# EAGLE board POVRotor (EAGLE 8.4.1)
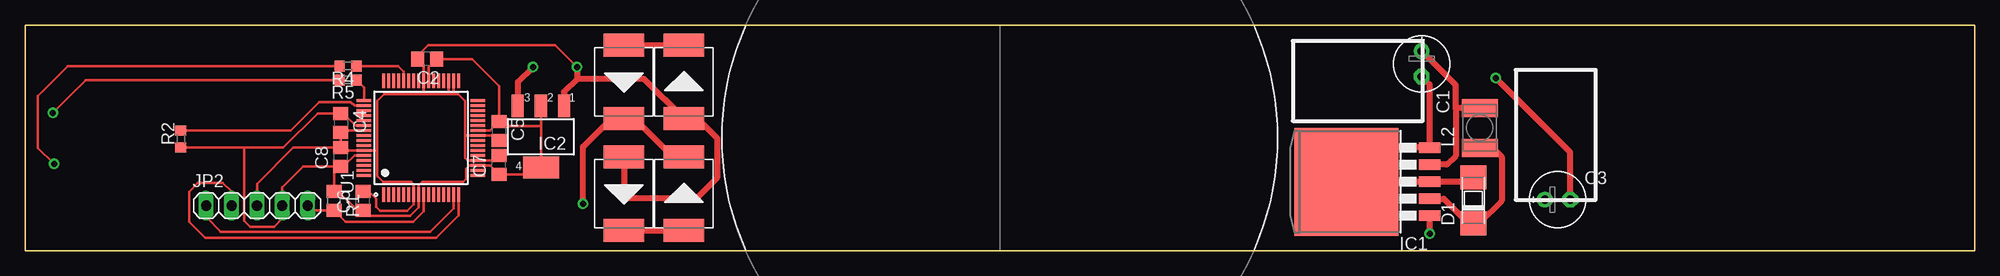
[diagram p0: board, top side]
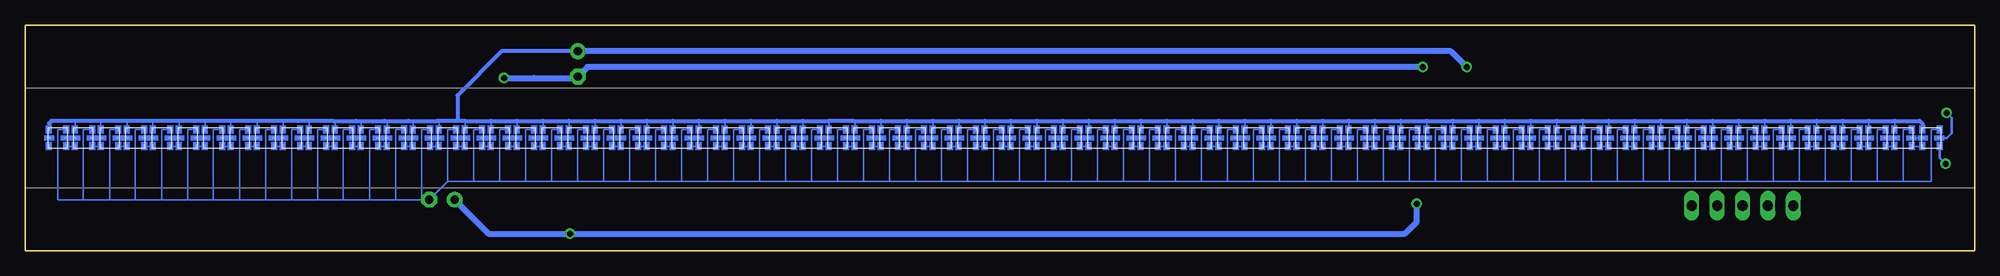
[diagram p1: board, bottom side, seen from below]

Size 195 x 22.6 mm. Coordinates in mm from the lower left corner, seen from the top.
Outline: 0,22.6 195,22.6 195,0 0,0 0,22.6
Copper layers (1*16): Top 0.035mm / dielectric 1.5mm / Bottom 0.035mm
Design rules "default *": minimum track width 0.1mm, minimum drill 24mil, track to track 8mil, track to pad 8mil, pad to pad 8mil, via to via 8mil, smd to smd 8mil, copper to edge 40mil, drill to drill 8mil, minimum pad ring 10mil, minimum via ring 8mil, stop-mask expansion 4mil, vias tented up to drill 0mil, thermal gap 10mil

## Footprints (pad centres in the part's own frame; a part is rotated, then mirrored left to right if it is on the bottom)
E2,5-6E = drill 0.813 pad 1.575: + -1.27,0 | drill 0.813 pad 1.575 octagon: - 1.27,0
C0805 = smd 1.3 x 1.5: 1 -0.95,0; 2 0.95,0
SOD106A = smd 2.4 x 2.6: A 2.3,0; K -2.3,0
DO-214AB = smd 2.286 x 4.064: 1 -3.683,0; 2 3.683,0
TO263-5 = smd 1.067 x 2.159: 1 -3.404,-5.791; 2 -1.702,-5.791; 3 0,-5.791; 4 1.702,-5.791; 5 3.404,-5.791 | smd 10.8 x 10.41: 6 0,2.54
SOT223 = smd 1.219 x 2.235: 1 -2.311,-3.099; 2 0,-3.099; 3 2.311,-3.099 | smd 3.6 x 2.2: 4 0,3.099
1X05 = drill 1.016 long: 1 -5.08,0; 2 -2.54,0; 3 0,0; 4 2.54,0; 5 5.08,0
L4532P = smd 1.8 x 3.6: 1 -2,0; 2 2,0
R0805 = smd 1.3 x 1.5: 1 -0.95,0; 2 0.95,0
R0603 = smd 1 x 1.1: 1 -0.85,0; 2 0.85,0
QFP50P1200X1200X120-64N = smd 1.45 x 0.3: 1 -5.7,3.75; 2 -5.7,3.25; 3 -5.7,2.75; 4 -5.7,2.25; 5 -5.7,1.75; 6 -5.7,1.25; 7 -5.7,0.75; 8 -5.7,0.25; 9 -5.7,-0.25; 10 -5.7,-0.75; 11 -5.7,-1.25; 12 -5.7,-1.75; 13 -5.7,-2.25; 14 -5.7,-2.75; 15 -5.7,-3.25; 16 -5.7,-3.75; 33 5.7,-3.75; 34 5.7,-3.25; 35 5.7,-2.75; 36 5.7,-2.25; 37 5.7,-1.75; 38 5.7,-1.25; 39 5.7,-0.75; 40 5.7,-0.25; 41 5.7,0.25; 42 5.7,0.75; 43 5.7,1.25; 44 5.7,1.75; 45 5.7,2.25; 46 5.7,2.75; 47 5.7,3.25; 48 5.7,3.75 | smd 0.3 x 1.45: 17 -3.75,-5.7; 18 -3.25,-5.7; 19 -2.75,-5.7; 20 -2.25,-5.7; 21 -1.75,-5.7; 22 -1.25,-5.7; 23 -0.75,-5.7; 24 -0.25,-5.7; 25 0.25,-5.7; 26 0.75,-5.7; 27 1.25,-5.7; 28 1.75,-5.7; 29 2.25,-5.7; 30 2.75,-5.7; 31 3.25,-5.7; 32 3.75,-5.7; 49 3.75,5.7; 50 3.25,5.7; 51 2.75,5.7; 52 2.25,5.7; 53 1.75,5.7; 54 1.25,5.7; 55 0.75,5.7; 56 0.25,5.7; 57 -0.25,5.7; 58 -0.75,5.7; 59 -1.25,5.7; 60 -1.75,5.7; 61 -2.25,5.7; 62 -2.75,5.7; 63 -3.25,5.7; 64 -3.75,5.7
2020LED = smd 0.305 x 0.152: CLKI -0.85,0; CLKO 0.85,0 | smd 0.152 x 0.305: GND -0.85,-0.85; SDI -0.85,0.85; SDO 0.85,0.85; VCC 0.85,-0.85

## Placement (x,y rotation side)
C1  [E2,5-6E]  139.7,18.7 270 top
C2  [C0805]  40.2,19.2 180 top
C3  [E2,5-6E]  153.3,5.1 0 top
C4  [C0805]  31.6,12.8 270 top
C5  [C0805]  47.4,12 270 top
C6  [C0805]  33.8,5 90 top
C7  [C0805]  47.4,8.6 90 top
C8  [C0805]  31.6,9.4 90 top
D1  [SOD106A]  144.89,5.04 90 top
D2  SMD-DIODE-SCHOTTKY-40V-3A(DO-214AB)  [DO-214AB]  65.9,5.7 90 top
D3  SMD-DIODE-SCHOTTKY-40V-3A(DO-214AB)  [DO-214AB]  59.9,16.9 270 top
D4  SMD-DIODE-SCHOTTKY-40V-3A(DO-214AB)  [DO-214AB]  65.9,16.9 90 top
D5  SMD-DIODE-SCHOTTKY-40V-3A(DO-214AB)  [DO-214AB]  59.9,5.7 270 top
IC1  LM2576S  [TO263-5]  134.7,6.9 90 top
IC2  [SOT223]  51.6,11.4 180 top
JP2  [1X05]  23.2,4.5 0 top
L2  [L4532P]  145.5,12.3 90 top
R1  [R0805]  30.9,5 270 top
R2  [R0603]  15.6,11.2 90 top
R4  [R0603]  32.3,18.5 180 top
R5  [R0603]  32.3,17.1 180 top
U1  PIC32MZ2048EFH064-I/PT  [QFP50P1200X1200X120-64N]  39.6,11.3 90 top
U$1  2020LED  [2020LED]  7.15,11.3 180 bottom
U$2  2020LED  [2020LED]  4.35,11.3 180 bottom
U$3  2020LED  [2020LED]  9.75,11.3 180 bottom
U$4  2020LED  [2020LED]  12.35,11.3 180 bottom
U$5  2020LED  [2020LED]  14.95,11.3 180 bottom
U$6  2020LED  [2020LED]  17.55,11.3 180 bottom
U$7  2020LED  [2020LED]  20.15,11.3 180 bottom
U$8  2020LED  [2020LED]  22.75,11.3 180 bottom
U$9  2020LED  [2020LED]  25.35,11.3 180 bottom
U$10  2020LED  [2020LED]  27.95,11.3 180 bottom
U$11  2020LED  [2020LED]  30.55,11.3 180 bottom
U$12  2020LED  [2020LED]  33.15,11.3 180 bottom
U$13  2020LED  [2020LED]  35.75,11.3 180 bottom
U$14  2020LED  [2020LED]  38.35,11.3 180 bottom
U$15  2020LED  [2020LED]  40.95,11.3 180 bottom
U$16  2020LED  [2020LED]  43.55,11.3 180 bottom
U$17  2020LED  [2020LED]  46.15,11.3 180 bottom
U$18  2020LED  [2020LED]  48.75,11.3 180 bottom
U$19  2020LED  [2020LED]  51.35,11.3 180 bottom
U$20  2020LED  [2020LED]  53.95,11.3 180 bottom
U$21  2020LED  [2020LED]  56.55,11.3 180 bottom
U$22  2020LED  [2020LED]  59.15,11.3 180 bottom
U$23  2020LED  [2020LED]  61.75,11.3 180 bottom
U$24  2020LED  [2020LED]  64.35,11.3 180 bottom
U$25  2020LED  [2020LED]  66.95,11.3 180 bottom
U$26  2020LED  [2020LED]  69.55,11.3 180 bottom
U$27  2020LED  [2020LED]  72.15,11.3 180 bottom
U$28  2020LED  [2020LED]  74.75,11.3 180 bottom
U$29  2020LED  [2020LED]  77.35,11.3 180 bottom
U$30  2020LED  [2020LED]  79.95,11.3 180 bottom
U$31  2020LED  [2020LED]  82.55,11.3 180 bottom
U$32  2020LED  [2020LED]  85.15,11.3 180 bottom
U$33  2020LED  [2020LED]  87.75,11.3 180 bottom
U$34  2020LED  [2020LED]  90.35,11.3 180 bottom
U$35  2020LED  [2020LED]  92.95,11.3 180 bottom
U$36  2020LED  [2020LED]  95.55,11.3 180 bottom
U$37  2020LED  [2020LED]  98.15,11.3 180 bottom
U$38  2020LED  [2020LED]  100.75,11.3 180 bottom
U$39  2020LED  [2020LED]  103.35,11.3 180 bottom
U$40  2020LED  [2020LED]  105.95,11.3 180 bottom
U$41  2020LED  [2020LED]  108.55,11.3 180 bottom
U$42  2020LED  [2020LED]  111.15,11.3 180 bottom
U$43  2020LED  [2020LED]  113.75,11.3 180 bottom
U$44  2020LED  [2020LED]  116.35,11.3 180 bottom
U$45  2020LED  [2020LED]  118.95,11.3 180 bottom
U$46  2020LED  [2020LED]  121.55,11.3 180 bottom
U$47  2020LED  [2020LED]  124.15,11.3 180 bottom
U$48  2020LED  [2020LED]  126.75,11.3 180 bottom
U$49  2020LED  [2020LED]  129.35,11.3 180 bottom
U$50  2020LED  [2020LED]  131.95,11.3 180 bottom
U$51  2020LED  [2020LED]  134.55,11.3 180 bottom
U$52  2020LED  [2020LED]  137.15,11.3 180 bottom
U$53  2020LED  [2020LED]  139.75,11.3 180 bottom
U$54  2020LED  [2020LED]  142.35,11.3 180 bottom
U$55  2020LED  [2020LED]  144.95,11.3 180 bottom
U$56  2020LED  [2020LED]  147.55,11.3 180 bottom
U$57  2020LED  [2020LED]  150.15,11.3 180 bottom
U$58  2020LED  [2020LED]  152.75,11.3 180 bottom
U$59  2020LED  [2020LED]  155.35,11.3 180 bottom
U$60  2020LED  [2020LED]  157.95,11.3 180 bottom
U$61  2020LED  [2020LED]  160.55,11.3 180 bottom
U$62  2020LED  [2020LED]  163.15,11.3 180 bottom
U$63  2020LED  [2020LED]  165.75,11.3 180 bottom
U$64  2020LED  [2020LED]  168.35,11.3 180 bottom
U$65  2020LED  [2020LED]  170.95,11.3 180 bottom
U$66  2020LED  [2020LED]  173.55,11.3 180 bottom
U$67  2020LED  [2020LED]  176.15,11.3 180 bottom
U$68  2020LED  [2020LED]  178.75,11.3 180 bottom
U$69  2020LED  [2020LED]  181.35,11.3 180 bottom
U$70  2020LED  [2020LED]  183.95,11.3 180 bottom
U$71  2020LED  [2020LED]  186.55,11.3 180 bottom
U$72  2020LED  [2020LED]  189.15,11.3 180 bottom
U$73  2020LED  [2020LED]  191.75,11.3 180 bottom

## Library data of the parts
C1-C8 L2 R1 R2 R4 R5 = resistor
D1 = telefunken; MPN: BYS10/45; OC_FARNELL: 9549188; OC_NEWARK: 96K7236
D2-D5 = SMD-DIODE-SCHOTTKY-40V-3A_DO-214AB_; AVAILABILITY: Good; DESCRIPTION: Rectifier%2C Schottky%3B DO-214AB%3B 3.0A IF%3B 0.75V%3B 40V%3B 100A IFRM%3B 10000V/us%3B 1000pF; MF: Vishay; MP: SS34-E3/57T; PACKAGE: DO-214 Vishay; PRICE: 0.24 USD
IC1 IC2 = lm2576
JP2 = pinhead
U1 = PIC32MZ2048EFH064-I_PT; AVAILABILITY: Good; DESCRIPTION: PIC32MZ Series 2 MB Flash 512 kB RAM 200 MHz 32-Bit Microcontroller - TQFP-64; MF: Microchip; MP: PIC32MZ2048EFH064-I/PT; PACKAGE: TQFP-64 Microchip; PRICE: 11.29 USD
U$1-U$73 = APA2020

## Nets
+3V3: C2.1 C4.1 C5.1 C6.1 C7.1 C8.1 IC2.2 JP2.4 R1.1 R2.1 U1.8 U1.19 U1.26 U1.39 U1.54 U1.60
+5V: C1.+ IC1.4 IC2.3 L2.2 U$1.VCC U$2.VCC U$3.VCC U$4.VCC U$5.VCC U$6.VCC U$7.VCC U$8.VCC U$9.VCC U$10.VCC U$11.VCC U$12.VCC U$13.VCC U$14.VCC U$15.VCC U$16.VCC U$17.VCC U$18.VCC U$19.VCC U$20.VCC U$21.VCC U$22.VCC U$23.VCC U$24.VCC U$25.VCC U$26.VCC U$27.VCC U$28.VCC U$29.VCC U$30.VCC U$31.VCC U$32.VCC U$33.VCC U$34.VCC U$35.VCC U$36.VCC U$37.VCC U$38.VCC U$39.VCC U$40.VCC U$41.VCC U$42.VCC U$43.VCC U$44.VCC U$45.VCC U$46.VCC U$47.VCC U$48.VCC U$49.VCC U$50.VCC U$51.VCC U$52.VCC U$53.VCC U$54.VCC U$55.VCC U$56.VCC U$57.VCC U$58.VCC U$59.VCC U$60.VCC U$61.VCC U$62.VCC U$63.VCC U$64.VCC U$65.VCC U$66.VCC U$67.VCC U$68.VCC U$69.VCC U$70.VCC U$71.VCC U$72.VCC U$73.VCC
+15V: C3.+ D2.2 D3.2 IC1.1
GND: C1.- C2.2 C3.- C4.2 C5.2 C6.2 C7.2 C8.2 D1.A D4.1 D5.1 IC1.3 IC1.5 IC2.1 JP2.3 U1.7 U1.20 U1.25 U1.34 U1.35 U1.40 U1.55 U1.59 U$1.GND U$2.GND U$3.GND U$4.GND U$5.GND U$6.GND U$7.GND U$8.GND U$9.GND U$10.GND U$11.GND U$12.GND U$13.GND U$14.GND U$15.GND U$16.GND U$17.GND U$18.GND U$19.GND U$20.GND U$21.GND U$22.GND U$23.GND U$24.GND U$25.GND U$26.GND U$27.GND U$28.GND U$29.GND U$30.GND U$31.GND U$32.GND U$33.GND U$34.GND U$35.GND U$36.GND U$37.GND U$38.GND U$39.GND U$40.GND U$41.GND U$42.GND U$43.GND U$44.GND U$45.GND U$46.GND U$47.GND U$48.GND U$49.GND U$50.GND U$51.GND U$52.GND U$53.GND U$54.GND U$55.GND U$56.GND U$57.GND U$58.GND U$59.GND U$60.GND U$61.GND U$62.GND U$63.GND U$64.GND U$65.GND U$66.GND U$67.GND U$68.GND U$69.GND U$70.GND U$71.GND U$72.GND U$73.GND
N$1: D2.1 D5.2
N$2: D3.1 D4.2
N$3: D1.K IC1.2 L2.1
N$5: R2.2 U1.50
N$6: U$1.SDI U$2.SDO
N$7: U$10.SDO U$11.SDI
N$8: U$10.CLKO U$11.CLKI
N$9: U$1.CLKI U$2.CLKO
N$11: U$11.SDO U$12.SDI
N$12: JP2.2 U1.16
N$13: JP2.1 U1.15
N$14: JP2.5 R1.2 U1.9
N$16: R4.2 U$2.SDI
N$17: U$1.SDO U$3.SDI
N$18: R5.2 U$2.CLKI
N$19: R5.1 U1.49
N$20: U$1.CLKO U$3.CLKI
N$21: R4.1 U1.44
N$24: U$11.CLKO U$12.CLKI
N$25: U$12.SDO U$13.SDI
N$27: U$12.CLKO U$13.CLKI
N$28: U$13.SDO U$14.SDI
N$29: U$3.SDO U$4.SDI
N$30: U$3.CLKO U$4.CLKI
N$31: U$13.CLKO U$14.CLKI
N$32: U$14.SDO U$15.SDI
N$33: U$14.CLKO U$15.CLKI
N$34: U$4.SDO U$5.SDI
N$35: U$4.CLKO U$5.CLKI
N$36: U$15.SDO U$16.SDI
N$37: U$15.CLKO U$16.CLKI
N$38: U$16.SDO U$17.SDI
N$39: U$16.CLKO U$17.CLKI
N$40: U$5.SDO U$6.SDI
N$41: U$5.CLKO U$6.CLKI
N$42: U$17.SDO U$18.SDI
N$43: U$17.CLKO U$18.CLKI
N$44: U$18.SDO U$19.SDI
N$45: U$18.CLKO U$19.CLKI
N$46: U$6.SDO U$7.SDI
N$48: U$19.SDO U$20.SDI
N$49: U$19.CLKO U$20.CLKI
N$51: U$20.SDO U$21.SDI
N$52: U$20.CLKO U$21.CLKI
N$53: U$21.SDO U$22.SDI
N$54: U$6.CLKO U$7.CLKI
N$55: U$21.CLKO U$22.CLKI
N$56: U$22.SDO U$23.SDI
N$57: U$22.CLKO U$23.CLKI
N$58: U$23.SDO U$24.SDI
N$59: U$23.CLKO U$24.CLKI
N$60: U$7.SDO U$8.SDI
N$61: U$24.SDO U$25.SDI
N$62: U$7.CLKO U$8.CLKI
N$63: U$24.CLKO U$25.CLKI
N$64: U$25.SDO U$26.SDI
N$65: U$25.CLKO U$26.CLKI
N$66: U$8.SDO U$9.SDI
N$67: U$8.CLKO U$9.CLKI
N$68: U$26.SDO U$27.SDI
N$69: U$26.CLKO U$27.CLKI
N$70: U$9.SDO U$10.SDI
N$71: U$9.CLKO U$10.CLKI
N$72: U$27.SDO U$28.SDI
N$73: U$27.CLKO U$28.CLKI
N$75: U$28.SDO U$29.SDI
N$76: U$28.CLKO U$29.CLKI
N$77: U$29.SDO U$30.SDI
N$78: U$29.CLKO U$30.CLKI
N$79: U$30.SDO U$31.SDI
N$80: U$30.CLKO U$31.CLKI
N$81: U$31.SDO U$32.SDI
N$82: U$31.CLKO U$32.CLKI
N$83: U$32.SDO U$33.SDI
N$84: U$32.CLKO U$33.CLKI
N$85: U$33.SDO U$34.SDI
N$86: U$33.CLKO U$34.CLKI
N$87: U$34.SDO U$35.SDI
N$88: U$34.CLKO U$35.CLKI
N$89: U$35.SDO U$36.SDI
N$90: U$35.CLKO U$36.CLKI
N$91: U$36.SDO U$37.SDI
N$92: U$36.CLKO U$37.CLKI
N$93: U$37.SDO U$38.SDI
N$94: U$37.CLKO U$38.CLKI
N$96: U$38.SDO U$39.SDI
N$97: U$38.CLKO U$39.CLKI
N$98: U$39.SDO U$40.SDI
N$99: U$39.CLKO U$40.CLKI
N$100: U$40.SDO U$41.SDI
N$101: U$40.CLKO U$41.CLKI
N$102: U$41.SDO U$42.SDI
N$103: U$41.CLKO U$42.CLKI
N$104: U$42.SDO U$43.SDI
N$105: U$42.CLKO U$43.CLKI
N$106: U$43.SDO U$44.SDI
N$107: U$43.CLKO U$44.CLKI
N$108: U$44.SDO U$45.SDI
N$109: U$44.CLKO U$45.CLKI
N$110: U$45.SDO U$46.SDI
N$111: U$45.CLKO U$46.CLKI
N$113: U$46.SDO U$47.SDI
N$114: U$46.CLKO U$47.CLKI
N$115: U$47.SDO U$48.SDI
N$116: U$47.CLKO U$48.CLKI
N$117: U$48.SDO U$49.SDI
N$118: U$48.CLKO U$49.CLKI
N$119: U$49.SDO U$50.SDI
N$120: U$49.CLKO U$50.CLKI
N$121: U$50.SDO U$51.SDI
N$122: U$50.CLKO U$51.CLKI
N$123: U$51.SDO U$52.SDI
N$124: U$51.CLKO U$52.CLKI
N$125: U$52.SDO U$53.SDI
N$126: U$52.CLKO U$53.CLKI
N$127: U$53.SDO U$54.SDI
N$128: U$53.CLKO U$54.CLKI
N$129: U$54.SDO U$55.SDI
N$130: U$54.CLKO U$55.CLKI
N$131: U$55.SDO U$56.SDI
N$132: U$55.CLKO U$56.CLKI
N$133: U$56.SDO U$57.SDI
N$134: U$56.CLKO U$57.CLKI
N$135: U$57.SDO U$58.SDI
N$136: U$57.CLKO U$58.CLKI
N$137: U$58.SDO U$59.SDI
N$138: U$58.CLKO U$59.CLKI
N$139: U$59.SDO U$60.SDI
N$140: U$59.CLKO U$60.CLKI
N$141: U$60.SDO U$61.SDI
N$142: U$60.CLKO U$61.CLKI
N$143: U$61.SDO U$62.SDI
N$144: U$61.CLKO U$62.CLKI
N$145: U$62.SDO U$63.SDI
N$146: U$62.CLKO U$63.CLKI
N$147: U$63.SDO U$64.SDI
N$148: U$63.CLKO U$64.CLKI
N$149: U$64.SDO U$65.SDI
N$150: U$64.CLKO U$65.CLKI
N$151: U$65.SDO U$66.SDI
N$152: U$65.CLKO U$66.CLKI
N$153: U$66.SDO U$67.SDI
N$154: U$66.CLKO U$67.CLKI
N$155: U$67.SDO U$68.SDI
N$156: U$67.CLKO U$68.CLKI
N$157: U$68.SDO U$69.SDI
N$158: U$68.CLKO U$69.CLKI
N$159: U$69.SDO U$70.SDI
N$160: U$69.CLKO U$70.CLKI
N$161: U$70.SDO U$71.SDI
N$162: U$70.CLKO U$71.CLKI
N$163: U$71.SDO U$72.SDI
N$164: U$71.CLKO U$72.CLKI
N$165: U$72.SDO U$73.SDI
N$166: U$72.CLKO U$73.CLKI
VBUS: U1.33

## Tracks (layer width: path | path; a pad name or v marks a point on that pad's centre or on a via)
+3V3
  Top 0.254: U1.39 40.35,18.4 C2.1 44.7,19.2 47.4,16.5 C5.1 | C5.1 46.5,12.05 U1.26 | U1.60 32.95,9.55 31.85,8.45 C8.1 30.9,8.45 | U1.54 33.05,12.55 31.85,13.75 C4.1 29.25,13.75 25.85,10.35 22.2,10.35 | 30.9,8.45 27.85,8.45 25.74,6.34 JP2.4 25.74,3.24 24.9,2.4 22.5,2.4 21.9,3 21.9,10.35 22.2,10.35 | 31.45,5.45 R1.1 | C5.1 47.85,12.5 51.6,12.5 | 51.6,13.4 IC2.2 51.6,12.5 | 22.2,10.35 R2.1 | 51.6,12.5 51.6,8.5 50.75,7.65 C7.1 46.5,8.55 U1.19 44.45,8.55 44.1,8.2 44.1,7.2 43.8,6.9 39.7,6.9 39.35,6.55 U1.8 39.35,4.35 38.5,3.5 34.35,3.5 C6.1 33.25,4.05 31.35,5.95 R1.1 | R1.1 30.9,8.45
+5V  (via drill 0.6)
  Top 0.61: 143.1,14.2 143.1,16.6 139.73,19.97 C1.+ | 143.1,14.2 143.1,9.5 142.2,8.6 IC1.4 | L2.2 143.2,14.3 143.1,14.2 | v50.8,18.4 49.29,16.89 IC2.3
  Bottom 0.152: U$72.VCC 190,13 190.2,13 | U$71.VCC 187.4,13 187.65,13 | U$70.VCC 184.8,13 184.95,13 | U$69.VCC 182.2,13 182.45,13 | U$68.VCC 179.6,13 179.9,13 | U$67.VCC 177,13 177.3,13 | U$66.VCC 174.4,13 174.8,13 | U$65.VCC 171.8,13 171.95,13 | U$64.VCC 169.2,13 169.45,13 | U$63.VCC 166.6,13 167.35,13 | U$1.VCC 8,13 | U$3.VCC 10.6,13 | U$4.VCC 13.2,13 | U$5.VCC 15.8,13 | U$6.VCC 18.4,13 | U$7.VCC 21,13 | U$8.VCC 23.6,13 | U$9.VCC 26.2,13 | U$10.VCC 28.8,13 | U$11.VCC 31.4,13 | U$12.VCC 34,13 | U$13.VCC 36.6,13 | U$14.VCC 39.2,13 | U$15.VCC 41.8,13 | U$16.VCC 44.4,13 | U$17.VCC 47,13 | U$18.VCC 49.6,13 | U$19.VCC 52.2,13 | U$20.VCC 54.8,13 | U$21.VCC 57.4,13 | U$22.VCC 60,13 | U$23.VCC 62.6,13 | U$24.VCC 65.2,13 | U$25.VCC 67.8,13 | U$26.VCC 70.4,13 | U$27.VCC 73,13 | U$28.VCC 75.6,13 | U$29.VCC 78.2,13 | U$30.VCC 80.8,13 | U$31.VCC 83.4,13 | U$32.VCC 86,13 | U$33.VCC 88.6,13 | U$34.VCC 91.2,13 | U$35.VCC 93.8,13 | U$36.VCC 96.4,13 | U$37.VCC 99,13 | U$38.VCC 101.6,13 | U$39.VCC 104.2,13 | U$40.VCC 106.8,13 | U$41.VCC 109.4,13 | U$43.VCC 114.6,13 | U$44.VCC 117.2,13 | U$45.VCC 119.8,13 | U$46.VCC 122.4,13 | U$47.VCC 125,13 | U$48.VCC 127.6,13 | U$49.VCC 130.2,13 | U$50.VCC 132.8,13 | U$51.VCC 135.4,13 | U$52.VCC 138,13 | U$53.VCC 140.6,13 | U$54.VCC 143.2,13 | U$55.VCC 145.8,13 | U$56.VCC 148.4,13 | U$57.VCC 151,13 | U$58.VCC 153.6,13 153.75,13 | U$59.VCC 156.2,13 156.65,13 | U$60.VCC 158.8,13 159.05,13 | U$61.VCC 161.4,13 161.9,13 | U$62.VCC 164,13 164.25,13 | U$42.VCC 112,13 112.15,13
  Bottom 0.406: 151.75,13 153.75,13 156.65,13 159.05,13 161.9,13 164.25,13 167.35,13 169.45,13 171.95,13 174.8,13 177.3,13 179.9,13 182.45,13 184.95,13 187.65,13 190.2,13 192.35,13 192.6,12.75 U$73.VCC | 151.75,13 151,13 148.4,13 145.8,13 143.2,13 140.6,13 138,13 135.4,13 132.8,13 130.2,13 127.6,13 125,13 122.4,13 119.8,13 117.2,13 114.6,13 112.15,13 109.4,13 106.8,13 104.2,13 101.6,13 99,13 96.4,13 93.8,13 91.2,13 88.6,13 86,13 83.4,13 80.8,13 78.2,13 75.6,13 73,13 70.4,13 67.8,13 65.2,13 62.6,13 60,13 57.4,13 54.8,13 52.2,13 49.6,13 47,13 44.4,13 41.8,13 39.2,13 36.6,13 34,13 31.4,13 28.8,13 26.2,13 23.6,13 21,13 18.4,13 15.8,13 13.2,13 10.6,13 8,13 5.5,13 5.2,12.7 U$2.VCC | C1.+ 147.33,19.97 151.75,15.55 151.75,13
  Bottom 0.61: v50.8,18.4 52.37,19.97 C1.+
+15V  (via drill 0.6)
  Top 0.61: D2.2 65.22,8.98 60.58,13.62 D3.2 59.48,12.8 58.2,12.8 55.8,10.4 v55.8,4.7 | IC1.1 v140.49,1.71 v140.5,1.7
  Bottom 0.61: C3.+ 148.63,1.7 v140.5,1.7 57,1.7 55.8,2.9 v55.8,4.7
GND  (via drill 0.6)
  Top 0.254: C7.2 46.9,9.05 U1.20 44.25,9.05 44,9.3 44,11.6 | C5.2 46.9,11.55 U1.25 44.05,11.55 arc-90 44,11.6 | 31.67,10.31 C8.2 C4.2 31.8,12.05 U1.55 | 31.67,10.31 32.1,10.05 U1.59 35.2,10.05 | JP2.3 23.2,6.7 26.81,10.31 31.67,10.31 | v55.2,18.4 53,20.6 40.3,20.6 39.25,19.55 C2.2 39.85,18.6 U1.40 39.85,15.75 arc-90 39.8,15.7 | 35.2,10.05 35.2,15 35.9,15.7 39.8,15.7 | 42.4,15.7 39.8,15.7 | 42.4,15.7 42.9,15.7 | 42.9,15.7 43.3,15.7 44,15 44,11.6 | U1.34 42.85,15.75 arc90 42.9,15.7 | U1.35 42.35,15.75 arc90 42.4,15.7 | 35.2,10.05 35.2,7.5 35.8,6.9 38.6,6.9 38.85,6.65 U1.7 38.85,4.65 38.2,4 35.5,4 35.1,4.4 35.1,5.2 34.35,5.95 C6.2
  Top 0.61: D5.1 59.9,5.3 67.2,5.3 69.2,7.3 69.2,11.3 67.6,12.9 66.62,12.9 D4.1 61.92,17.2 55.2,17.2 | C1.- 140.49,16.64 IC1.5 134.7,10.3 134.7,6.9 IC1.3 144.45,6.9 D1.A | v55.2,18.4 55.2,17.2 | 55.2,17.2 53.91,15.91 IC2.1 | C3.- 154.57,9.83 v147.1,17.3
  Bottom 0.152: 144.1,17.35 144.1,17.3 | 55.05,18.4 v55.2,18.4 | U$73.GND 191.75,12.15 191.75,5.1 189.15,5.1 | 186.55,5.1 189.15,5.1 | 183.95,5.1 186.55,5.1 | 181.35,5.1 183.95,5.1 | 178.75,5.1 181.35,5.1 | 176.15,5.1 178.75,5.1 | 173.55,5.1 176.15,5.1 | 170.95,5.1 168.35,5.1 | 170.95,5.1 173.55,5.1 | 165.75,5.1 168.35,5.1 | 163.15,5.1 165.75,5.1 | 160.55,5.1 163.15,5.1 | 157.95,5.1 160.55,5.1 | 155.35,5.1 157.95,5.1 | 155.35,5.1 C3.- 152.75,6.92 | U$72.GND 189.15,12.15 189.15,5.1 | U$71.GND 186.55,12.15 186.55,5.1 | U$70.GND 183.95,12.15 183.95,5.1 | U$69.GND 181.35,12.15 181.35,5.1 | U$68.GND 178.75,12.15 178.75,5.1 | U$67.GND 176.15,12.15 176.15,5.1 | U$66.GND 173.55,12.15 173.55,5.1 | U$64.GND 168.35,12.15 168.35,5.1 | U$63.GND 165.75,12.15 165.75,5.1 | U$62.GND 163.15,12.15 163.15,5.1 | U$61.GND 160.55,12.15 160.55,5.1 | U$60.GND 157.95,12.15 157.95,5.1 | U$59.GND 155.35,12.15 155.35,5.1 | U$58.GND 152.75,12.15 152.75,6.92 | U$57.GND 150.15,12.15 150.15,6.92 | 150.15,6.92 152.75,6.92 | U$56.GND 147.55,12.15 147.55,6.92 | 147.55,6.92 150.15,6.92 | U$55.GND 144.95,12.15 144.95,6.92 | 144.95,6.92 147.55,6.92 | U$54.GND 142.35,12.15 142.35,6.92 | 142.35,6.92 144.95,6.92 | U$53.GND 139.75,12.15 139.75,6.92 | 139.75,6.92 142.35,6.92 | U$52.GND 137.15,12.15 137.15,6.92 | 137.15,6.92 139.75,6.92 | U$51.GND 134.55,12.15 134.55,6.92 | 134.55,6.92 137.15,6.92 | U$50.GND 131.95,12.15 131.95,6.92 | 131.95,6.92 134.55,6.92 | U$49.GND 129.35,12.15 129.35,6.92 | 129.35,6.92 131.95,6.92 | U$48.GND 126.75,12.15 126.75,6.92 | 126.75,6.92 129.35,6.92 | U$47.GND 124.15,12.15 124.15,6.92 | 124.15,6.92 126.75,6.92 | U$46.GND 121.55,12.15 121.55,6.92 | 121.55,6.92 124.15,6.92
  Bottom 0.152: U$45.GND 118.95,12.15 118.95,6.92 | 118.95,6.92 121.55,6.92 | U$44.GND 116.35,12.15 116.35,6.92 | 116.35,6.92 118.95,6.92 | U$43.GND 113.75,12.15 113.75,6.92 | 113.75,6.92 116.35,6.92 | U$42.GND 111.15,12.15 111.15,6.92 | 111.15,6.92 113.75,6.92 | U$41.GND 108.55,12.15 108.55,6.92 | 108.55,6.92 111.15,6.92 | U$40.GND 105.95,12.15 105.95,6.92 | 105.95,6.92 108.55,6.92 | U$39.GND 103.35,12.15 103.35,6.92 | 103.35,6.92 105.95,6.92 | U$38.GND 100.75,12.15 100.75,6.92 | 100.75,6.92 103.35,6.92 | U$37.GND 98.15,12.15 98.15,6.92 | 98.15,6.92 100.75,6.92 | U$36.GND 95.55,12.15 95.55,6.92 | 95.55,6.92 98.15,6.92 | U$35.GND 92.95,12.15 92.95,6.92 | 92.95,6.92 95.55,6.92 | U$34.GND 90.35,12.15 90.35,6.92 | 90.35,6.92 92.95,6.92 | U$33.GND 87.75,12.15 87.75,6.92 | 87.75,6.92 90.35,6.92 | U$32.GND 85.15,12.15 85.15,6.92 | 85.15,6.92 87.75,6.92 | U$31.GND 82.55,12.15 82.55,6.92 | 82.55,6.92 85.15,6.92 | U$30.GND 79.95,12.15 79.95,6.92 | 79.95,6.92 82.55,6.92 | U$29.GND 77.35,12.15 77.35,6.92 | 77.35,6.92 79.95,6.92 | U$28.GND 74.75,12.15 74.75,6.92 | 74.75,6.92 77.35,6.92 | U$27.GND 72.15,12.15 72.15,6.92 | 72.15,6.92 74.75,6.92 | U$26.GND 69.55,12.15 69.55,6.92 | 69.55,6.92 72.15,6.92 | U$25.GND 66.95,12.15 66.95,6.92 | 66.95,6.92 69.55,6.92 | U$24.GND 64.35,12.15 64.35,6.92 | 64.35,6.92 66.95,6.92 | U$23.GND 61.75,12.15 61.75,6.92 | 61.75,6.92 64.35,6.92 | U$22.GND 59.15,12.15 59.15,6.92 | 59.15,6.92 61.75,6.92 | U$21.GND 56.55,12.15 56.55,6.92 | 56.55,6.92 59.15,6.92 | U$20.GND 53.95,12.15 53.95,6.92 | 53.95,6.92 56.55,6.92 | U$19.GND 51.35,12.15 51.35,6.92 | 51.35,6.92 53.95,6.92 | U$18.GND 48.75,12.15 48.75,6.92 | 48.75,6.92 51.35,6.92 | U$17.GND 46.15,12.15 46.15,6.92
  Bottom 0.152: 46.15,6.92 48.75,6.92 | U$16.GND 43.55,12.15 43.55,6.92 | 43.55,6.92 46.15,6.92 | U$15.GND 40.95,12.15 40.95,6.92 | 40.95,6.92 43.55,6.92 | U$14.GND 38.35,12.15 38.35,6.92 | 38.35,6.92 40.95,6.92 | U$13.GND 35.75,12.15 35.75,6.92 | 35.75,6.92 38.35,6.92 | U$12.GND 33.15,12.15 33.15,6.92 | 33.15,6.92 35.75,6.92 | U$11.GND 30.55,12.15 30.55,6.92 | 30.55,6.92 33.15,6.92 | U$10.GND 27.95,12.15 27.95,6.92 | 27.95,6.92 30.55,6.92 | U$9.GND 25.35,12.15 25.35,6.92 | 25.35,6.92 27.95,6.92 | U$8.GND 22.75,12.15 22.75,6.92 | 22.75,6.92 25.35,6.92 | U$7.GND 20.15,12.15 20.15,6.92 | 20.15,6.92 22.75,6.92 | U$6.GND 17.55,12.15 17.55,6.92 | 17.55,6.92 20.15,6.92 | U$5.GND 14.95,12.15 14.95,6.92 | 14.95,6.92 17.55,6.92 | U$4.GND 12.35,12.15 12.35,6.92 | 12.35,6.92 14.95,6.92 | U$3.GND 9.75,12.15 9.75,6.92 | 9.75,6.92 12.35,6.92 | U$1.GND 7.15,12.15 7.15,6.92 | 7.15,6.92 9.75,6.92 | U$2.GND 4.35,12.15 4.35,6.92 7.15,6.92 | U$65.GND 170.95,12.15 170.95,5.1
  Bottom 0.61: C1.- 139.93,17.2 | v55.2,18.4 138.73,18.4 C1.- | v147.1,17.3 144.1,17.3 139.83,17.3 C1.-
N$1
  Top 0.61: D5.2 D2.1
N$2
  Top 0.61: D3.1 D4.2
N$3
  Top 0.61: IC1.2 141.9,5.2 144.36,2.74 D1.K 145.44,2.74 147.7,5 147.7,9.4 146.62,10.48 146.44,10.3 L2.1
N$5
  Top 0.254: U1.50 32.95,14.55 32.6,14.9 29.4,14.9 26.55,12.05 R2.2
N$6
  Bottom 0.152: U$2.SDO U$1.SDI
N$7
  Bottom 0.152: U$10.SDO U$11.SDI
N$8
  Bottom 0.152: U$10.CLKO U$11.CLKI
N$9
  Bottom 0.152: U$2.CLKO U$1.CLKI
N$11
  Bottom 0.152: U$11.SDO U$12.SDI
N$12
  Top 0.254: JP2.2 20.66,5.94 19.8,6.8 17.3,6.8 16.4,5.9 16.4,2.9 18,1.3 41.1,1.3 43.35,3.55 U1.16
N$13
  Top 0.254: U1.15 42.85,4.25 40.5,1.9 19.6,1.9 18.12,3.38 JP2.1
N$14
  Top 0.254: JP2.5 28.73,4.05 R1.2 32.05,2.9 38.8,2.9 39.85,3.95 U1.9
N$16  (via drill 0.6)
  Top 0.254: v2.9,8.7 1.3,10.3 1.3,15.5 4.3,18.5 R4.2
  Bottom 0.254: U$2.SDI 3.5,9.3 v2.9,8.7
N$17
  Bottom 0.152: U$1.SDO U$3.SDI
N$18  (via drill 0.6)
  Top 0.254: v2.8,13.8 6.1,17.1 R5.2
  Bottom 0.254: U$2.CLKI 2.8,11.3 2.3,11.8 2.3,13.3 v2.8,13.8
N$19
  Top 0.254: R5.1 33.9,16.35 U1.49
N$20
  Bottom 0.152: U$1.CLKO U$3.CLKI
N$21
  Top 0.254: R4.1 37.3,18.5 37.85,17.95 U1.44
N$24
  Bottom 0.152: U$11.CLKO U$12.CLKI
N$25
  Bottom 0.152: U$12.SDO U$13.SDI
N$27
  Bottom 0.152: U$12.CLKO U$13.CLKI
N$28
  Bottom 0.152: U$13.SDO U$14.SDI
N$29
  Bottom 0.152: U$3.SDO U$4.SDI
N$30
  Bottom 0.152: U$3.CLKO U$4.CLKI
N$31
  Bottom 0.152: U$13.CLKO U$14.CLKI
N$32
  Bottom 0.152: U$14.SDO U$15.SDI
N$33
  Bottom 0.152: U$14.CLKO U$15.CLKI
N$34
  Bottom 0.152: U$4.SDO U$5.SDI
N$35
  Bottom 0.152: U$4.CLKO U$5.CLKI
N$36
  Bottom 0.152: U$16.SDI U$15.SDO
N$37
  Bottom 0.152: U$15.CLKO U$16.CLKI
N$38
  Bottom 0.152: U$16.SDO U$17.SDI
N$39
  Bottom 0.152: U$16.CLKO U$17.CLKI
N$40
  Bottom 0.152: U$5.SDO U$6.SDI
N$41
  Bottom 0.152: U$5.CLKO U$6.CLKI
N$42
  Bottom 0.152: U$17.SDO U$18.SDI
N$43
  Bottom 0.152: U$17.CLKO U$18.CLKI
N$44
  Bottom 0.152: U$18.SDO U$19.SDI
N$45
  Bottom 0.152: U$18.CLKO U$19.CLKI
N$46
  Bottom 0.152: U$6.SDO U$7.SDI
N$48
  Bottom 0.152: U$20.SDI U$19.SDO
N$49
  Bottom 0.152: U$19.CLKO U$20.CLKI
N$51
  Bottom 0.152: U$20.SDO U$21.SDI
N$52
  Bottom 0.152: U$20.CLKO U$21.CLKI
N$53
  Bottom 0.152: U$21.SDO U$22.SDI
N$54
  Bottom 0.152: U$6.CLKO U$7.CLKI
N$55
  Bottom 0.152: U$21.CLKO U$22.CLKI
N$56
  Bottom 0.152: U$23.SDI U$22.SDO
N$57
  Bottom 0.152: U$22.CLKO U$23.CLKI
N$58
  Bottom 0.152: U$23.SDO U$24.SDI
N$59
  Bottom 0.152: U$23.CLKO U$24.CLKI
N$60
  Bottom 0.152: U$7.SDO U$8.SDI
N$61
  Bottom 0.152: U$24.SDO U$25.SDI
N$62
  Bottom 0.152: U$7.CLKO U$8.CLKI
N$63
  Bottom 0.152: U$25.CLKI U$24.CLKO
N$64
  Bottom 0.152: U$25.SDO U$26.SDI
N$65
  Bottom 0.152: U$25.CLKO U$26.CLKI
N$66
  Bottom 0.152: U$8.SDO U$9.SDI
N$67
  Bottom 0.152: U$8.CLKO U$9.CLKI
N$68
  Bottom 0.152: U$27.SDI U$26.SDO
N$69
  Bottom 0.152: U$26.CLKO U$27.CLKI
N$70
  Bottom 0.152: U$9.SDO U$10.SDI
N$71
  Bottom 0.152: U$9.CLKO U$10.CLKI
N$72
  Bottom 0.152: U$27.SDO U$28.SDI
N$73
  Bottom 0.152: U$27.CLKO U$28.CLKI
N$75
  Bottom 0.152: U$28.SDO U$29.SDI
N$76
  Bottom 0.152: U$28.CLKO U$29.CLKI
N$77
  Bottom 0.152: U$29.SDO U$30.SDI
N$78
  Bottom 0.152: U$29.CLKO U$30.CLKI
N$79
  Bottom 0.152: U$30.SDO U$31.SDI
N$80
  Bottom 0.152: U$30.CLKO U$31.CLKI
N$81
  Bottom 0.152: U$31.SDO U$32.SDI
N$82
  Bottom 0.152: U$31.CLKO U$32.CLKI
N$83
  Bottom 0.152: U$32.SDO U$33.SDI
N$84
  Bottom 0.152: U$33.CLKI U$32.CLKO
N$85
  Bottom 0.152: U$34.SDI U$33.SDO
N$86
  Bottom 0.152: U$33.CLKO U$34.CLKI
N$87
  Bottom 0.152: U$34.SDO U$35.SDI
N$88
  Bottom 0.152: U$35.CLKI U$34.CLKO
N$89
  Bottom 0.152: U$36.SDI U$35.SDO
N$90
  Bottom 0.152: U$35.CLKO U$36.CLKI
N$91
  Bottom 0.152: U$37.SDI U$36.SDO
N$92
  Bottom 0.152: U$36.CLKO U$37.CLKI
N$93
  Bottom 0.152: U$37.SDO U$38.SDI
N$94
  Bottom 0.152: U$37.CLKO U$38.CLKI
N$96
  Bottom 0.152: U$38.SDO U$39.SDI
N$97
  Bottom 0.152: U$38.CLKO U$39.CLKI
N$98
  Bottom 0.152: U$40.SDI U$39.SDO
N$99
  Bottom 0.152: U$39.CLKO U$40.CLKI
N$100
  Bottom 0.152: U$40.SDO U$41.SDI
N$101
  Bottom 0.152: U$40.CLKO U$41.CLKI
N$102
  Bottom 0.152: U$42.SDI U$41.SDO
N$103
  Bottom 0.152: U$41.CLKO U$42.CLKI
N$104
  Bottom 0.152: U$43.SDI U$42.SDO
N$105
  Bottom 0.152: U$42.CLKO U$43.CLKI
N$106
  Bottom 0.152: U$44.SDI U$43.SDO
N$107
  Bottom 0.152: U$43.CLKO U$44.CLKI
N$108
  Bottom 0.152: U$45.SDI U$44.SDO
N$109
  Bottom 0.152: U$44.CLKO U$45.CLKI
N$110
  Bottom 0.152: U$46.SDI U$45.SDO
N$111
  Bottom 0.152: U$45.CLKO U$46.CLKI
N$113
  Bottom 0.152: U$47.SDI U$46.SDO
N$114
  Bottom 0.152: U$46.CLKO U$47.CLKI
N$115
  Bottom 0.152: U$47.SDO U$48.SDI
N$116
  Bottom 0.152: U$47.CLKO U$48.CLKI
N$117
  Bottom 0.152: U$48.SDO U$49.SDI
N$118
  Bottom 0.152: U$48.CLKO U$49.CLKI
N$119
  Bottom 0.152: U$49.SDO U$50.SDI
N$120
  Bottom 0.152: U$50.CLKI U$49.CLKO
N$121
  Bottom 0.152: U$50.SDO U$51.SDI
N$122
  Bottom 0.152: U$50.CLKO U$51.CLKI
N$123
  Bottom 0.152: U$52.SDI U$51.SDO
N$124
  Bottom 0.152: U$51.CLKO U$52.CLKI
N$125
  Bottom 0.152: U$52.SDO U$53.SDI
N$126
  Bottom 0.152: U$52.CLKO U$53.CLKI
N$127
  Bottom 0.152: U$53.SDO U$54.SDI
N$128
  Bottom 0.152: U$53.CLKO U$54.CLKI
N$129
  Bottom 0.152: U$54.SDO U$55.SDI
N$130
  Bottom 0.152: U$54.CLKO U$55.CLKI
N$131
  Bottom 0.152: U$55.SDO U$56.SDI
N$132
  Bottom 0.152: U$55.CLKO U$56.CLKI
N$133
  Bottom 0.152: U$56.SDO U$57.SDI
N$134
  Bottom 0.152: U$56.CLKO U$57.CLKI
N$135
  Bottom 0.152: U$57.SDO U$58.SDI
N$136
  Bottom 0.152: U$57.CLKO U$58.CLKI
N$137
  Bottom 0.152: U$58.SDO U$59.SDI
N$138
  Bottom 0.152: U$58.CLKO U$59.CLKI
N$139
  Bottom 0.152: U$60.SDI U$59.SDO
N$140
  Bottom 0.152: U$59.CLKO U$60.CLKI
N$141
  Bottom 0.152: U$60.SDO U$61.SDI
N$142
  Bottom 0.152: U$60.CLKO U$61.CLKI
N$143
  Bottom 0.152: U$61.SDO U$62.SDI
N$144
  Bottom 0.152: U$61.CLKO U$62.CLKI
N$145
  Bottom 0.152: U$63.SDI U$62.SDO
N$146
  Bottom 0.152: U$62.CLKO U$63.CLKI
N$147
  Bottom 0.152: U$63.SDO U$64.SDI
N$148
  Bottom 0.152: U$64.CLKI U$63.CLKO
N$149
  Bottom 0.152: U$65.SDI U$64.SDO
N$150
  Bottom 0.152: U$65.CLKI U$64.CLKO
N$151
  Bottom 0.152: U$65.SDO U$66.SDI
N$152
  Bottom 0.152: U$65.CLKO U$66.CLKI
N$153
  Bottom 0.152: U$67.SDI U$66.SDO
N$154
  Bottom 0.152: U$66.CLKO U$67.CLKI
N$155
  Bottom 0.152: U$67.SDO U$68.SDI
N$156
  Bottom 0.152: U$68.CLKI U$67.CLKO
N$157
  Bottom 0.152: U$69.SDI U$68.SDO
N$158
  Bottom 0.152: U$68.CLKO U$69.CLKI
N$159
  Bottom 0.152: U$70.SDI U$69.SDO
N$160
  Bottom 0.152: U$69.CLKO U$70.CLKI
N$161
  Bottom 0.152: U$70.SDO U$71.SDI
N$162
  Bottom 0.152: U$71.CLKI U$70.CLKO
N$163
  Bottom 0.152: U$72.SDI U$71.SDO
N$164
  Bottom 0.152: U$72.CLKI U$71.CLKO
N$165
  Bottom 0.152: U$73.SDI U$72.SDO
N$166
  Bottom 0.152: U$72.CLKO U$73.CLKI